# EAGLE board PGA44DIP44 (EAGLE 8.1.0)
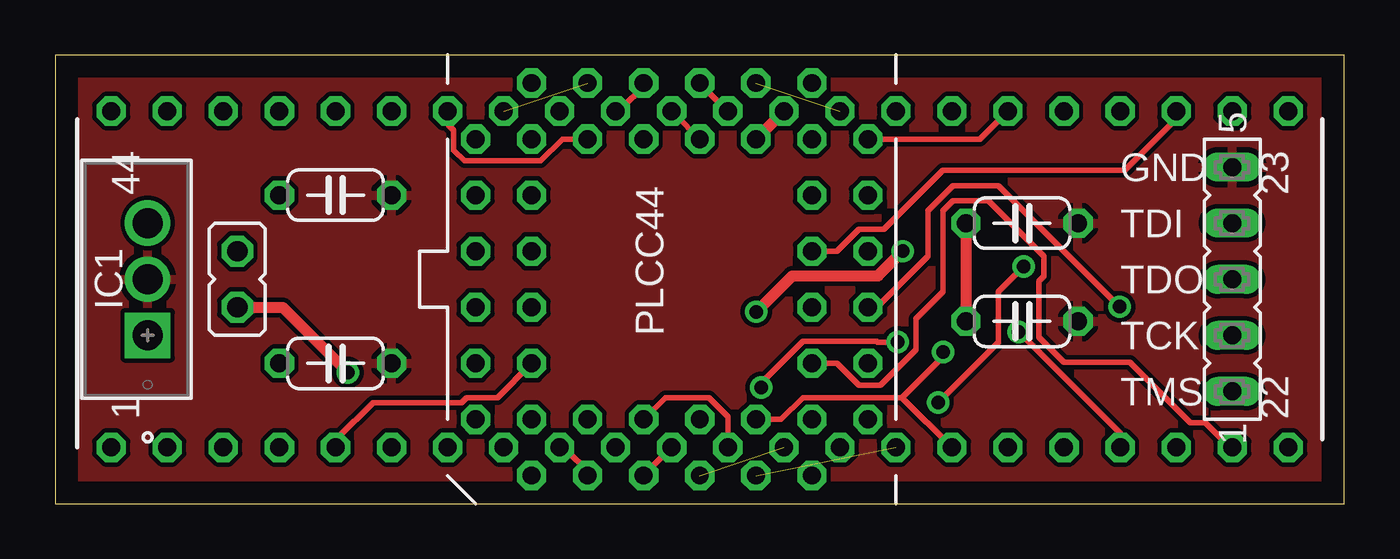
[diagram p0: board, top side]
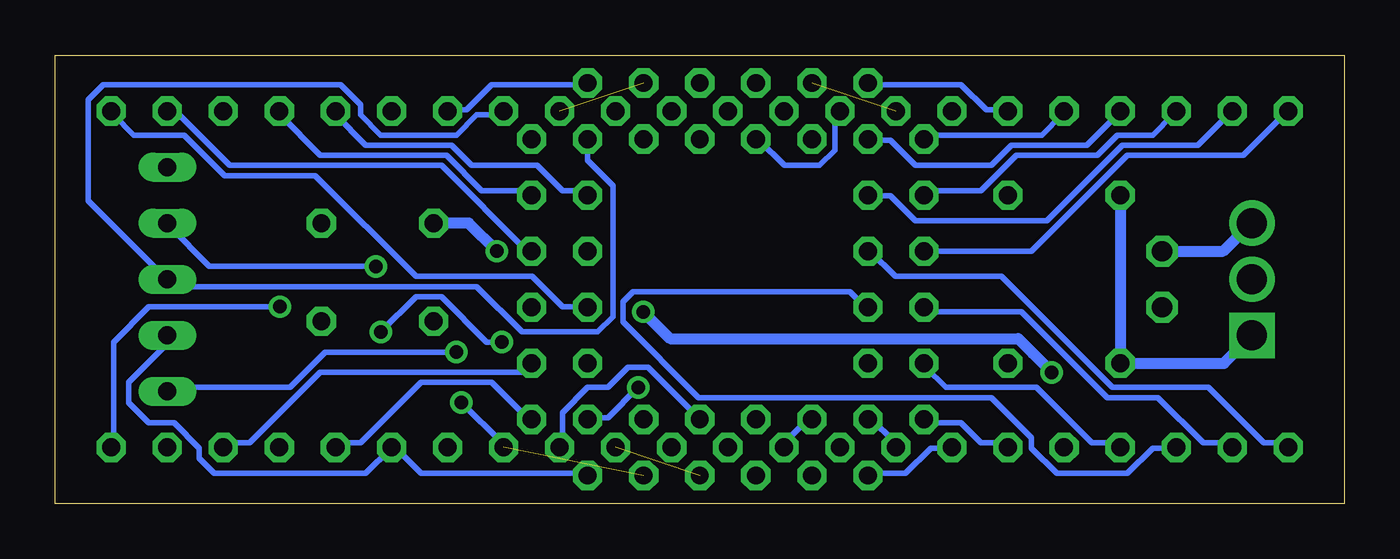
[diagram p1: board, bottom side, seen from below]

Size 58.42 x 20.31 mm. Coordinates in mm from the lower left corner, seen from the top.
Outline: 0,0 58.42,0 58.42,20.31 0,20.31 0,0
Copper layers (1*16): Top 0.035mm / dielectric 1.5mm / Bottom 0.035mm
Design rules "default *": minimum track width 10mil, minimum drill 24mil, track to track 8mil, track to pad 8mil, pad to pad 8mil, via to via 8mil, smd to smd 8mil, copper to edge 40mil, drill to drill 8mil, minimum pad ring 10mil, minimum via ring 8mil, stop-mask expansion 4mil, vias tented up to drill 0mil, thermal gap 10mil

## Footprints (pad centres in the part's own frame; a part is rotated, then mirrored left to right if it is on the bottom)
C050-024X044 = drill 0.813 octagon: 1 -2.54,0; 2 2.54,0
FE05-1 = drill 0.813 long: 1 -5.08,0; 2 -2.54,0; 3 0,0; 4 2.54,0; 5 5.08,0
DIP44 = drill 0.813 octagon: 1 -26.67,-8.89; 2 -24.13,-8.89; 3 -21.59,-8.89; 4 -19.05,-8.89; 5 -16.51,-8.89; 6 -13.97,-8.89; 7 -11.43,-8.89; 8 -8.89,-8.89; 9 -6.35,-8.89; 10 -3.81,-8.89; 11 -1.27,-8.89; 12 1.27,-8.89; 13 3.81,-8.89; 14 6.35,-8.89; 15 8.89,-8.89; 16 11.43,-8.89; 17 13.97,-8.89; 18 16.51,-8.89; 19 19.05,-8.89; 20 21.59,-8.89; 21 24.13,-8.89; 22 26.67,-8.89; 23 26.67,6.35; 24 24.13,6.35; 25 21.59,6.35; 26 19.05,6.35; 27 16.51,6.35; 28 13.97,6.35; 29 11.43,6.35; 30 8.89,6.35; 31 6.35,6.35; 32 3.81,6.35; 33 1.27,6.35; 34 -1.27,6.35; 35 -3.81,6.35; 36 -6.35,6.35; 37 -8.89,6.35; 38 -11.43,6.35; 39 -13.97,6.35; 40 -16.51,6.35; 41 -19.05,6.35; 42 -21.59,6.35; 43 -24.13,6.35; 44 -26.67,6.35
T03B = drill 1.372 pad 1.88 square: 1 -5.08,-1.016 | drill 1.372 pad 1.88: 2 -2.54,-1.016; 3 0,-1.016
JP1 = drill 0.914 octagon: 1 0,-1.27; 2 0,1.27
PGA44 = drill 0.813 octagon: 1 1.27,6.35; 2 -1.27,8.89; 3 -1.27,6.35; 4 -3.81,8.89; 5 -3.81,6.35; 6 -6.35,8.89; 7 -8.89,6.35; 8 -6.35,6.35; 9 -8.89,3.81; 10 -6.35,3.81; 11 -8.89,1.27; 12 -6.35,1.27; 13 -8.89,-1.27; 14 -6.35,-1.27; 15 -8.89,-3.81; 16 -6.35,-3.81; 17 -8.89,-6.35; 18 -6.35,-8.89; 19 -6.35,-6.35; 20 -3.81,-8.89; 21 -3.81,-6.35; 22 -1.27,-8.89; 23 -1.27,-6.35; 24 1.27,-8.89; 25 1.27,-6.35; 26 3.81,-8.89; 27 3.81,-6.35; 28 6.35,-8.89; 29 8.89,-6.35; 30 6.35,-6.35; 31 8.89,-3.81; 32 6.35,-3.81; 33 8.89,-1.27; 34 6.35,-1.27; 35 8.89,1.27; 36 6.35,1.27; 37 8.89,3.81; 38 6.35,3.81; 39 8.89,6.35; 40 6.35,8.89; 41 6.35,6.35; 42 3.81,8.89; 43 3.81,6.35; 44 1.27,8.89

## Placement (x,y rotation side)
C1  0.1uF  [C050-024X044]  12.7,6.35 0 top
C2  0.1uF  [C050-024X044]  12.7,13.97 0 top
C3  0.1uF  [C050-024X044]  43.81,8.26 0 top
C4  0.1uF  [C050-024X044]  43.81,12.7 0 top
CN1  JTAG  [FE05-1]  53.34,10.16 90 top
DIP44  DIP44  [DIP44]  29.21,11.43 0 top
IC1  LM2937ET-3.3/NOPB  [T03B]  3.17,12.7 90 top
JP1  [JP1]  8.25,10.16 180 top
PLCC44  PGA44  [PGA44]  27.94,10.16 90 top

## Library data of the parts
C1-C4 = rcl
CN1 = con-lsta; OC_FARNELL: unknown; OC_NEWARK: unknown
DIP44 JP1 PLCC44 = PGA44DIP44
IC1 = PGA44DIP44; MANUFACTURER_PART_NUMBER: lm2937et3_3nopb; VENDOR: National Semiconductor

## Nets
GND: C1.2 C2.2 C3.2 C4.2 CN1.5 IC1.2
L1: DIP44.1 PLCC44.1
L2: DIP44.2 PLCC44.2
L3: DIP44.3 PLCC44.3
L4: DIP44.4 PLCC44.4
L5: DIP44.5 PLCC44.5
L6: DIP44.6 PLCC44.6
L7: DIP44.7 PLCC44.7
L8: DIP44.8 PLCC44.8
L9: DIP44.9 PLCC44.9
L10: DIP44.10 PLCC44.10
L11: DIP44.11 PLCC44.11
L12: DIP44.12 PLCC44.12
L13: DIP44.13 PLCC44.13
L14: DIP44.14 PLCC44.14
L15: CN1.4 DIP44.15 PLCC44.15
L16: CN1.1 DIP44.16 PLCC44.16
L17: CN1.2 DIP44.17 PLCC44.17
L18: DIP44.18 PLCC44.18
L19: DIP44.19 PLCC44.19
L20: DIP44.20 PLCC44.20
L21: DIP44.21 PLCC44.21
L22: DIP44.22 PLCC44.22
L23: DIP44.23 PLCC44.23
L24: DIP44.24 PLCC44.24
L25: DIP44.25 PLCC44.25
L26: DIP44.26 PLCC44.26
L27: DIP44.27 PLCC44.27
L28: DIP44.28 PLCC44.28
L29: DIP44.29 PLCC44.29
L30: CN1.3 DIP44.30 PLCC44.30
L31: DIP44.31 PLCC44.31
L32: DIP44.32 PLCC44.32
L33: DIP44.33 PLCC44.33
L34: DIP44.34 PLCC44.34
L35: DIP44.35 PLCC44.35
L36: DIP44.36 PLCC44.36
L37: DIP44.37 PLCC44.37
L38: DIP44.38 PLCC44.38
L39: DIP44.39 PLCC44.39
L40: DIP44.40 PLCC44.40
L41: DIP44.41 PLCC44.41
L42: DIP44.42 PLCC44.42
L43: DIP44.43 PLCC44.43
L44: DIP44.44 PLCC44.44
N$1: IC1.3 JP1.1
VCCINT: C3.1 C4.1 JP1.2
VCCIO: C1.1 C2.1 IC1.1

## Tracks (layer width: path | path; a pad name or v marks a point on that pad's centre or on a via)
GND
  pour Top: 0.63,19.69 57.78,19.69 57.78,0.64 0.63,0.64
  pour Top: 0.63,19.69 57.78,19.69 57.78,0.64 0.63,0.64
L1
  Bottom 0.254: DIP44.1 2.74,2.74 3.66,2.74 6.17,5.26 10.52,5.26 15.54,10.29 20.34,10.29 21.49,11.43 PLCC44.1
L2
  Bottom 0.254: DIP44.2 5.26,2.74 6.4,2.74 8.46,4.8 10.74,4.8 14.63,8.69 18.97,8.69 PLCC44.2
L3
  Bottom 0.254: DIP44.3 7.77,2.52 8.69,2.52 9.83,1.37 13.03,1.37 14.17,2.52 14.17,2.97 16,4.8 29.26,4.8 32.69,8.23 32.69,9.14 32.23,9.6 22.4,9.6 21.72,8.92 PLCC44.3
L4
  Bottom 0.254: DIP44.4 10.29,2.74 11.43,2.74 13.94,5.26 18.06,5.26 18.97,6.17 PLCC44.4
L5
  Top 0.254: 17.37,4.57 17.14,4.57 | 17.14,4.57 14.4,4.57 12.8,2.97 12.8,2.74 DIP44.5 | 17.14,4.57 18.41,4.57 18.64,4.8 20.04,4.8 PLCC44.5
L6
  Bottom 0.254: DIP44.6 15.32,2.74 16.46,2.74 17.37,3.66 18.97,3.66 PLCC44.6
L7
  Bottom 0.254: DIP44.7 17.83,2.52 18.74,2.52 19.89,1.37 21.49,1.37 PLCC44.7
L8
  Bottom 0.254: DIP44.8 20.34,2.74 21.49,3.89 PLCC44.8
L9
  Top 0.254: DIP44.9 23.09,2.52 24.23,1.37 PLCC44.9
L10
  Bottom 0.254: DIP44.10 25.37,2.74 24.23,3.89 PLCC44.10
L11
  Top 0.254: PLCC44.11 26.75,1.37 27.89,2.52 DIP44.11
L12
  Top 0.254: PLCC44.12 27.66,4.8 29.62,4.8 30.48,3.94 DIP44.12
L13  (1 unrouted)
L14
  Bottom 0.254: DIP44.14 35.43,2.74 35.43,4.12 34.29,5.26 33.38,5.26 32.46,6.17 31.55,6.17 29.26,3.89 PLCC44.14
L15  (via drill 0.61)  (1 unrouted)
  Top 0.254: v40,4.57 42.75,7.32 42.75,9.6 v43.89,10.74
  Bottom 0.254: v40,4.57 38.18,2.74 DIP44.15 | v43.89,10.74 51.43,10.74 53.26,12.57 CN1.4
L16  (via drill 0.61)
  Top 0.254: 40.46,2.52 DIP44.16 38.38,4.8 | PLCC44.16 32.89,3.81 33.88,4.8 38.38,4.8 | v40.23,6.86 40.23,6.65 38.38,4.8
  Bottom 0.254: v40.23,6.86 46.18,6.86 47.78,5.26 53.26,5.26 CN1.1
L17
  Bottom 0.254: PLCC44.17 34.29,1.37 41.83,1.37 42.98,2.52 DIP44.17 43.2,2.52 44.35,1.37 51.21,1.37 51.89,2.06 51.89,2.52 53.03,3.66 54.18,3.66 55.09,4.57 55.09,5.49 53.49,7.09 53.49,7.54 CN1.2
L18
  Bottom 0.254: DIP44.18 45.72,2.74 44.58,2.74 41.83,5.49 38.63,5.49 37.03,3.89 PLCC44.18
L19  (via drill 0.61)
  Top 0.254: v38.18,7.32 37.27,7.32 37.24,7.34 33.88,7.34 32,5.47 v32,5.26 | DIP44.19 48.26,3.18 v43.66,7.77
  Bottom 0.254: v32,5.26 33.38,3.89 34.29,3.89 PLCC44.19 | v38.18,7.32 38.86,7.32 40.92,9.37 42.06,9.37 v43.66,7.77
L20
  Bottom 0.254: DIP44.20 50.75,2.74 49.61,2.74 46.41,5.94 37.26,5.94 37.03,6.17 PLCC44.20
L21
  Top 0.254: 40.23,11.89 40.23,12.07 | 40.23,12.07 40.23,13.26 40.69,13.72 42.29,13.72 44.81,11.2 44.81,10.29 44.58,10.06 44.58,7.54 45.72,6.4 48.69,6.4 51.43,3.66 52.12,3.66 53.03,2.74 53.26,2.74 DIP44.21 | PLCC44.21 35.43,6.35 36.42,5.36 37.41,5.36 39.01,6.97 39.01,8.38 40.23,9.6 40.23,12.07
L22  (via drill 0.61)
  Top 0.254: v48.23,8.92 42.75,14.4 40.69,14.4 39.55,13.26 39.55,11.2 37.24,8.89 PLCC44.22
  Bottom 0.254: v48.23,8.92 54.18,8.92 55.78,7.32 55.78,2.74 DIP44.22
L23
  Bottom 0.254: PLCC44.23 34.29,8.92 35.43,8.92 36.8,10.29 42.06,10.29 46.63,14.86 50.75,14.86 52.58,16.69 54.86,16.69 55.78,17.6 DIP44.23
L24
  Bottom 0.254: PLCC44.24 37.03,11.43 40.92,15.32 50.52,15.32 52.81,17.6 53.26,17.6 DIP44.24
L25
  Top 0.254: DIP44.25 50.98,17.6 48.46,15.09 40.23,15.09 37.57,12.42 36.42,12.42 35.43,11.43 PLCC44.25
L26
  Bottom 0.254: PLCC44.26 37.03,14.17 39.09,14.17 40.69,15.77 46.41,15.77 48.23,17.6 DIP44.26
L27
  Bottom 0.254: PLCC44.27 34.29,14.17 35.43,14.17 36.58,15.32 39.55,15.32 40.46,16.23 44.35,16.23 45.72,17.6 DIP44.27
L28
  Top 0.254: PLCC44.28 41.91,16.51 DIP44.28
L29
  Bottom 0.254: DIP44.29 40.46,17.83 39.78,17.83 38.63,18.97 34.29,18.97 PLCC44.29
L30
  Bottom 0.254: PLCC44.30 34.29,15.55 33.15,14.4 33.15,8.46 33.83,7.77 37.26,7.77 39.32,9.83 53.03,9.83 53.26,10.06 CN1.3 53.49,10.29 56.92,13.72 56.92,18.29 56.24,18.97 45.49,18.97 44.58,18.06 44.58,17.6 43.66,16.69 40.23,16.69 39.32,17.6 38.18,17.6 DIP44.30
L31  (1 unrouted)
L32
  Top 0.508: DIP44.32 PLCC44.32 | PLCC44.32
L33
  Top 0.254: DIP44.33 30.4,17.83 29.26,18.97 PLCC44.33
L34
  Top 0.254: PLCC44.34 28.12,17.6 DIP44.34
L35
  Top 0.254: DIP44.35 25.6,17.83 26.75,18.97 PLCC44.35
L36
  Bottom 0.254: DIP44.36 23.09,17.6 23.09,16 23.77,15.32 25.37,15.32 26.52,16.46 PLCC44.36
L37  (1 unrouted)
L38
  Top 0.254: DIP44.38 17.83,17.6 17.83,17.15 18.06,16.92 18.06,16 18.54,15.52 22,15.52 22.99,16.51 PLCC44.38
L39
  Bottom 0.254: DIP44.39 15.32,17.83 16.23,17.83 17.37,18.97 21.49,18.97 PLCC44.39
L40
  Bottom 0.254: PLCC44.40 18.97,16.69 13.72,16.69 12.8,17.6 DIP44.40
L41
  Bottom 0.254: PLCC44.41 21.49,16.46 20.57,16.46 19.43,15.32 16,15.32 15.09,16.23 11.66,16.23 10.29,17.6 DIP44.41
L42
  Bottom 0.254: PLCC44.42 18.97,14.17 16.46,14.17 14.86,15.77 11.2,15.77 10.29,16.69 8.69,16.69 7.77,17.6 DIP44.42
L43
  Bottom 0.254: PLCC44.43 21.49,13.95 20.57,13.95 19.43,12.8 13.49,12.8 10.06,16.23 6.63,16.23 5.26,17.6 DIP44.43
L44
  Bottom 0.254: PLCC44.44 14.17,11.43 9.83,15.77 4.57,15.77 2.74,17.6 DIP44.44
N$1
  Bottom 0.254: 4.34,12.57 IC1.3
  Bottom 0.508: JP1.1 5.49,11.43 4.34,12.57
VCCINT  (via drill 0.61)
  Top 0.508: JP1.2 10.31,8.89 v13.26,5.94 | v31.77,8.69 33.4,10.31 37.29,10.31 37.95,10.97 v38.4,11.43 | C4.1 C3.1
  Bottom 0.508: v13.26,5.94 14.12,6.81 14.78,7.47 30.56,7.47 v31.77,8.69 | v38.4,11.43 39.67,12.7 C4.1
VCCIO
  Bottom 0.508: IC1.1 5.46,6.35 C1.1 C2.1

## Text on the board
tNames: GND | TDI | TDO | TCK | TMS